# Altium PCB BMS_Rocket.PcbDoc
Units mil, origin at the board's own origin, x right, y up, seen from the top; angles counter-clockwise.
Board outline 2185.14 x 1885 mil, 4 copper layers (Top Layer, GND, Power, Bottom Layer), stack 22.378 mil thick; 56 components, 42 nets, 180 pads, 52 vias.
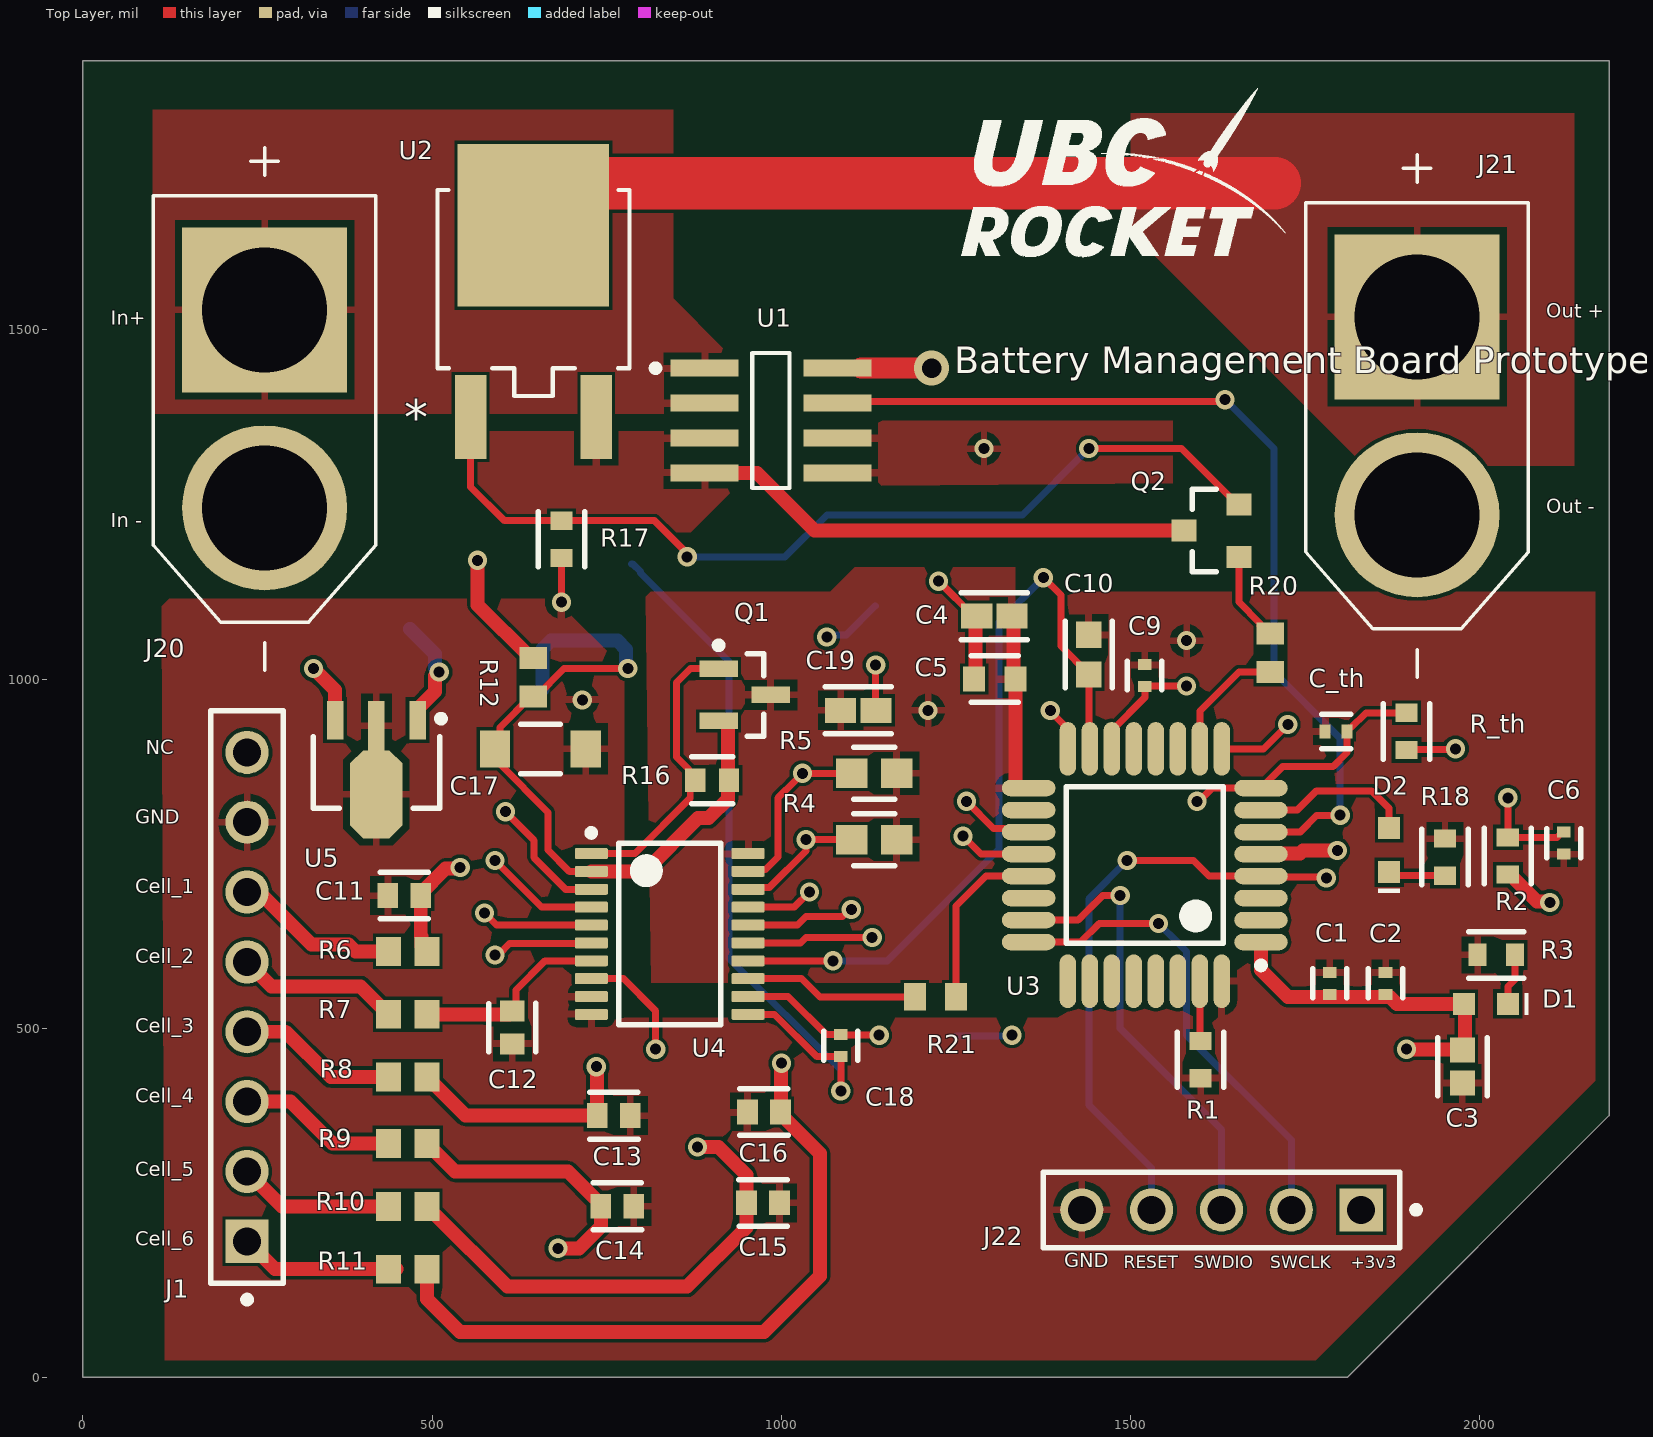
[diagram p0: Top Layer view]
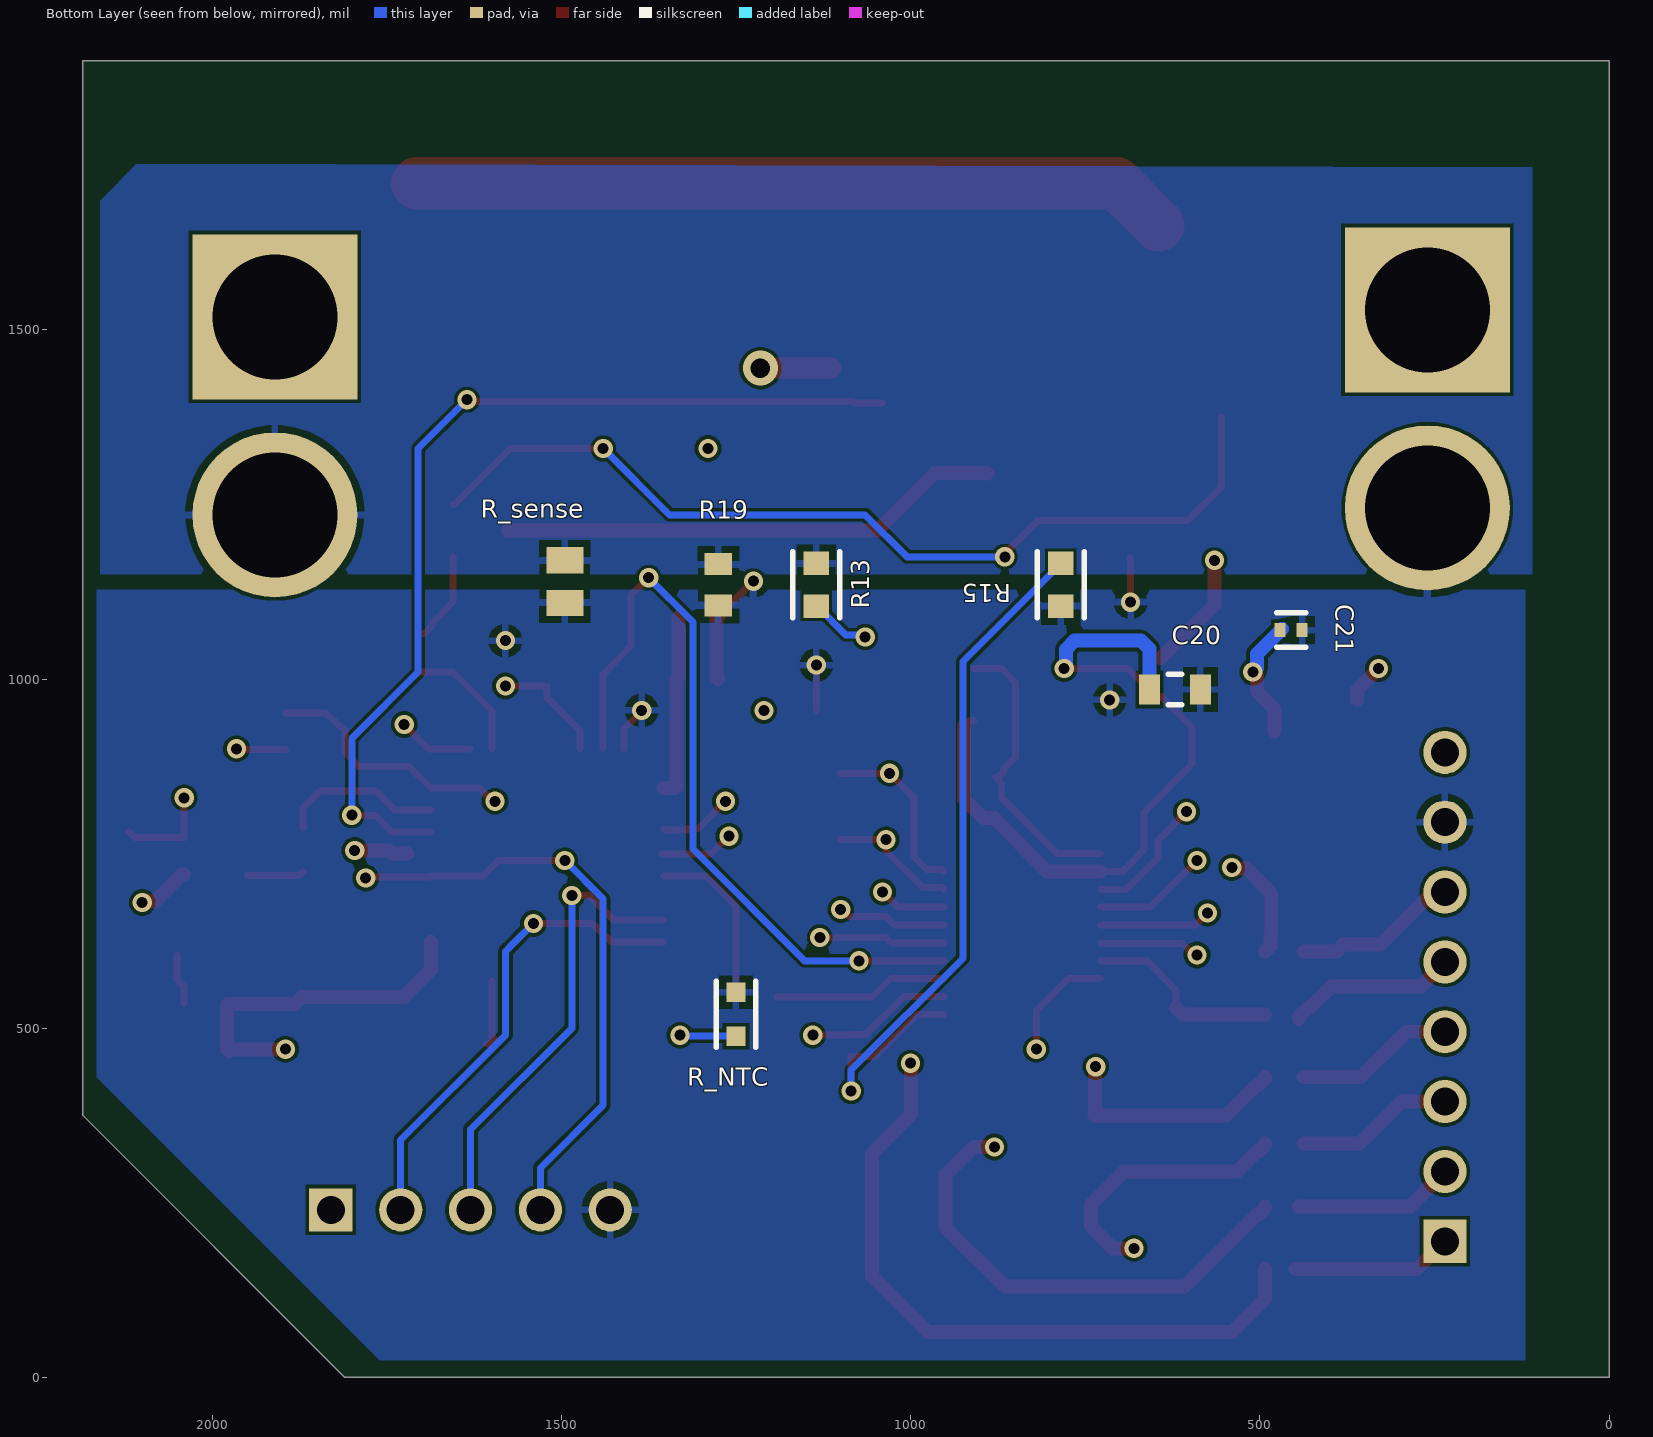
[diagram p1: Bottom Layer view, seen from below]
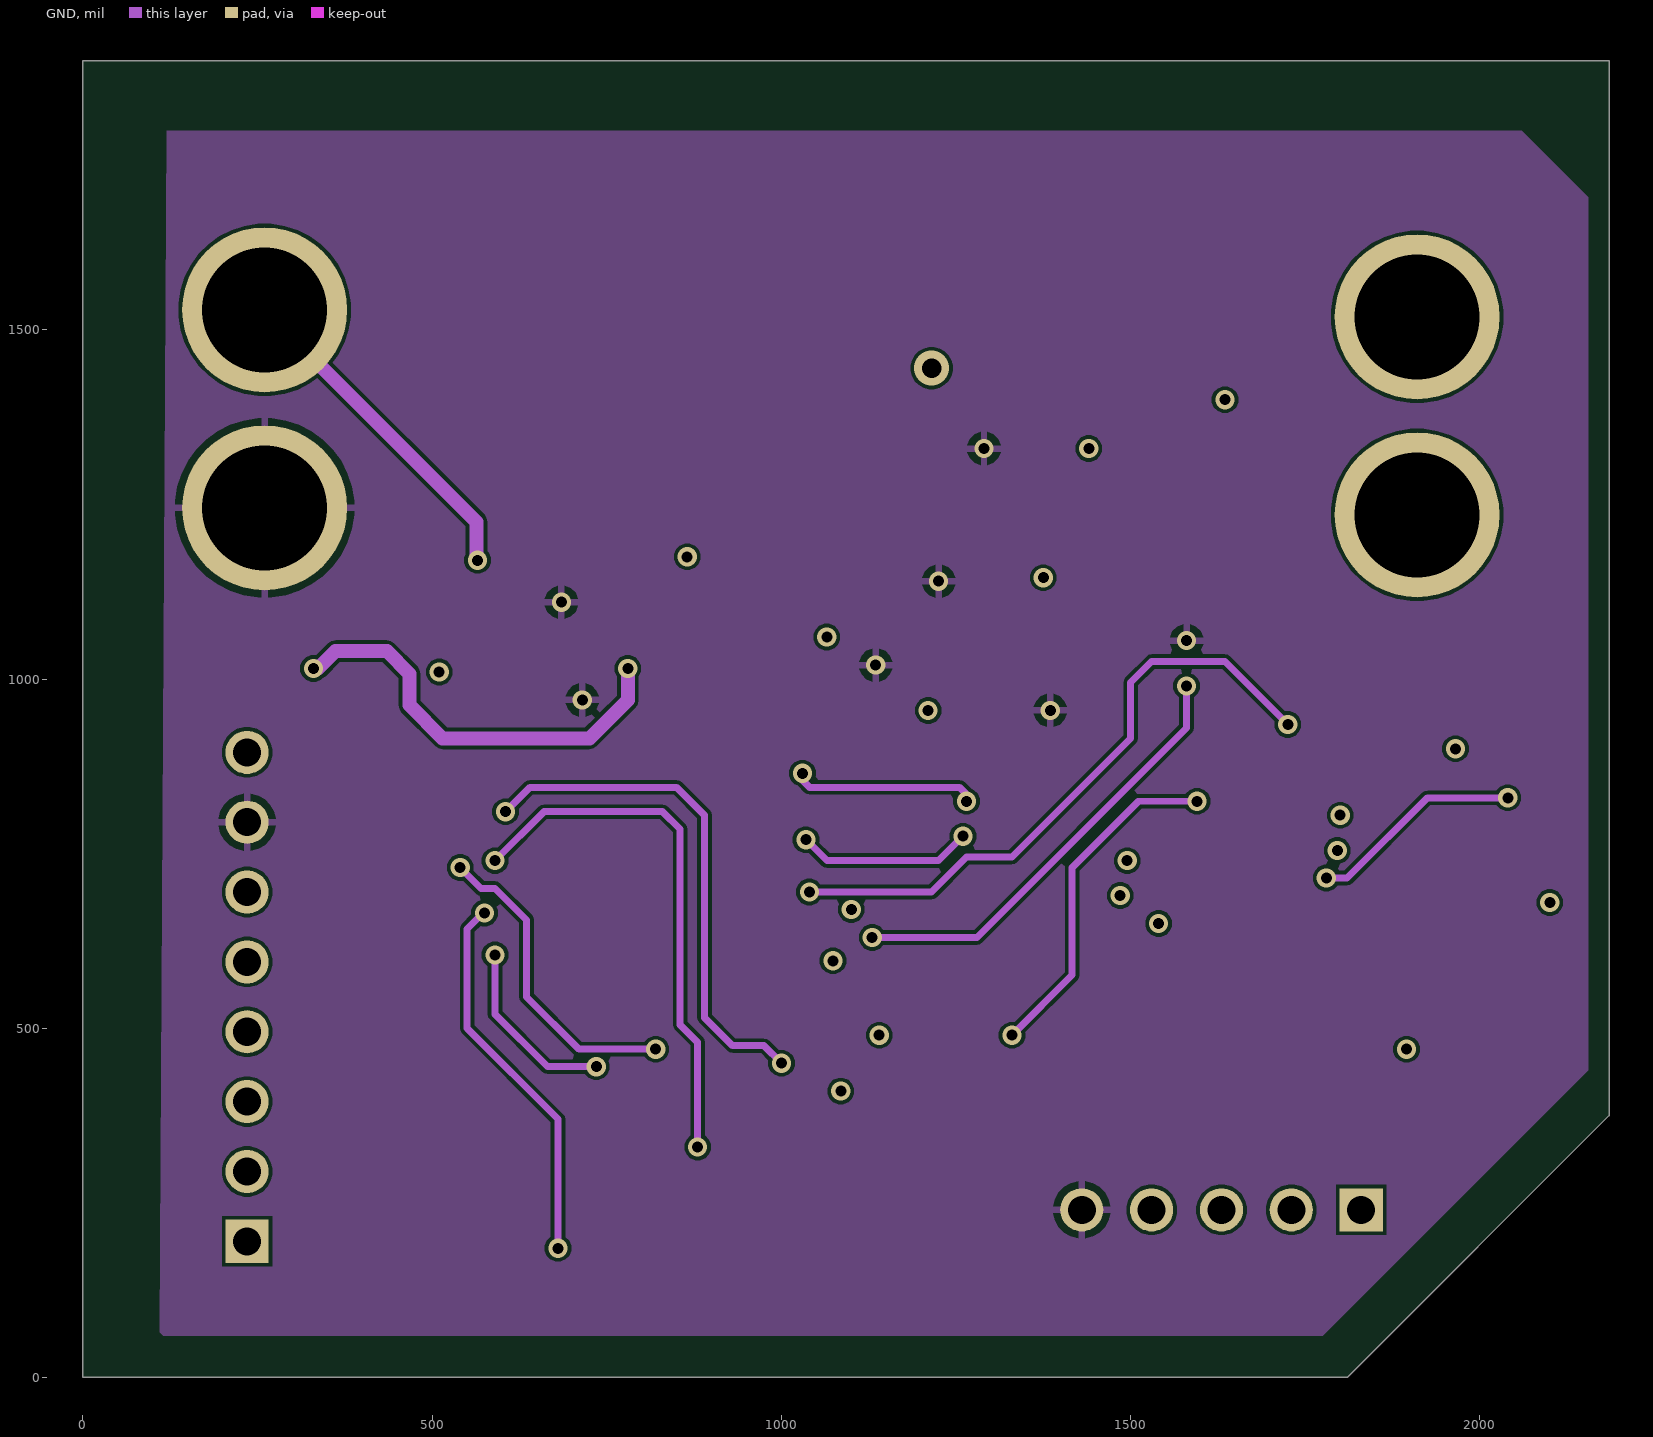
[diagram p2: GND]
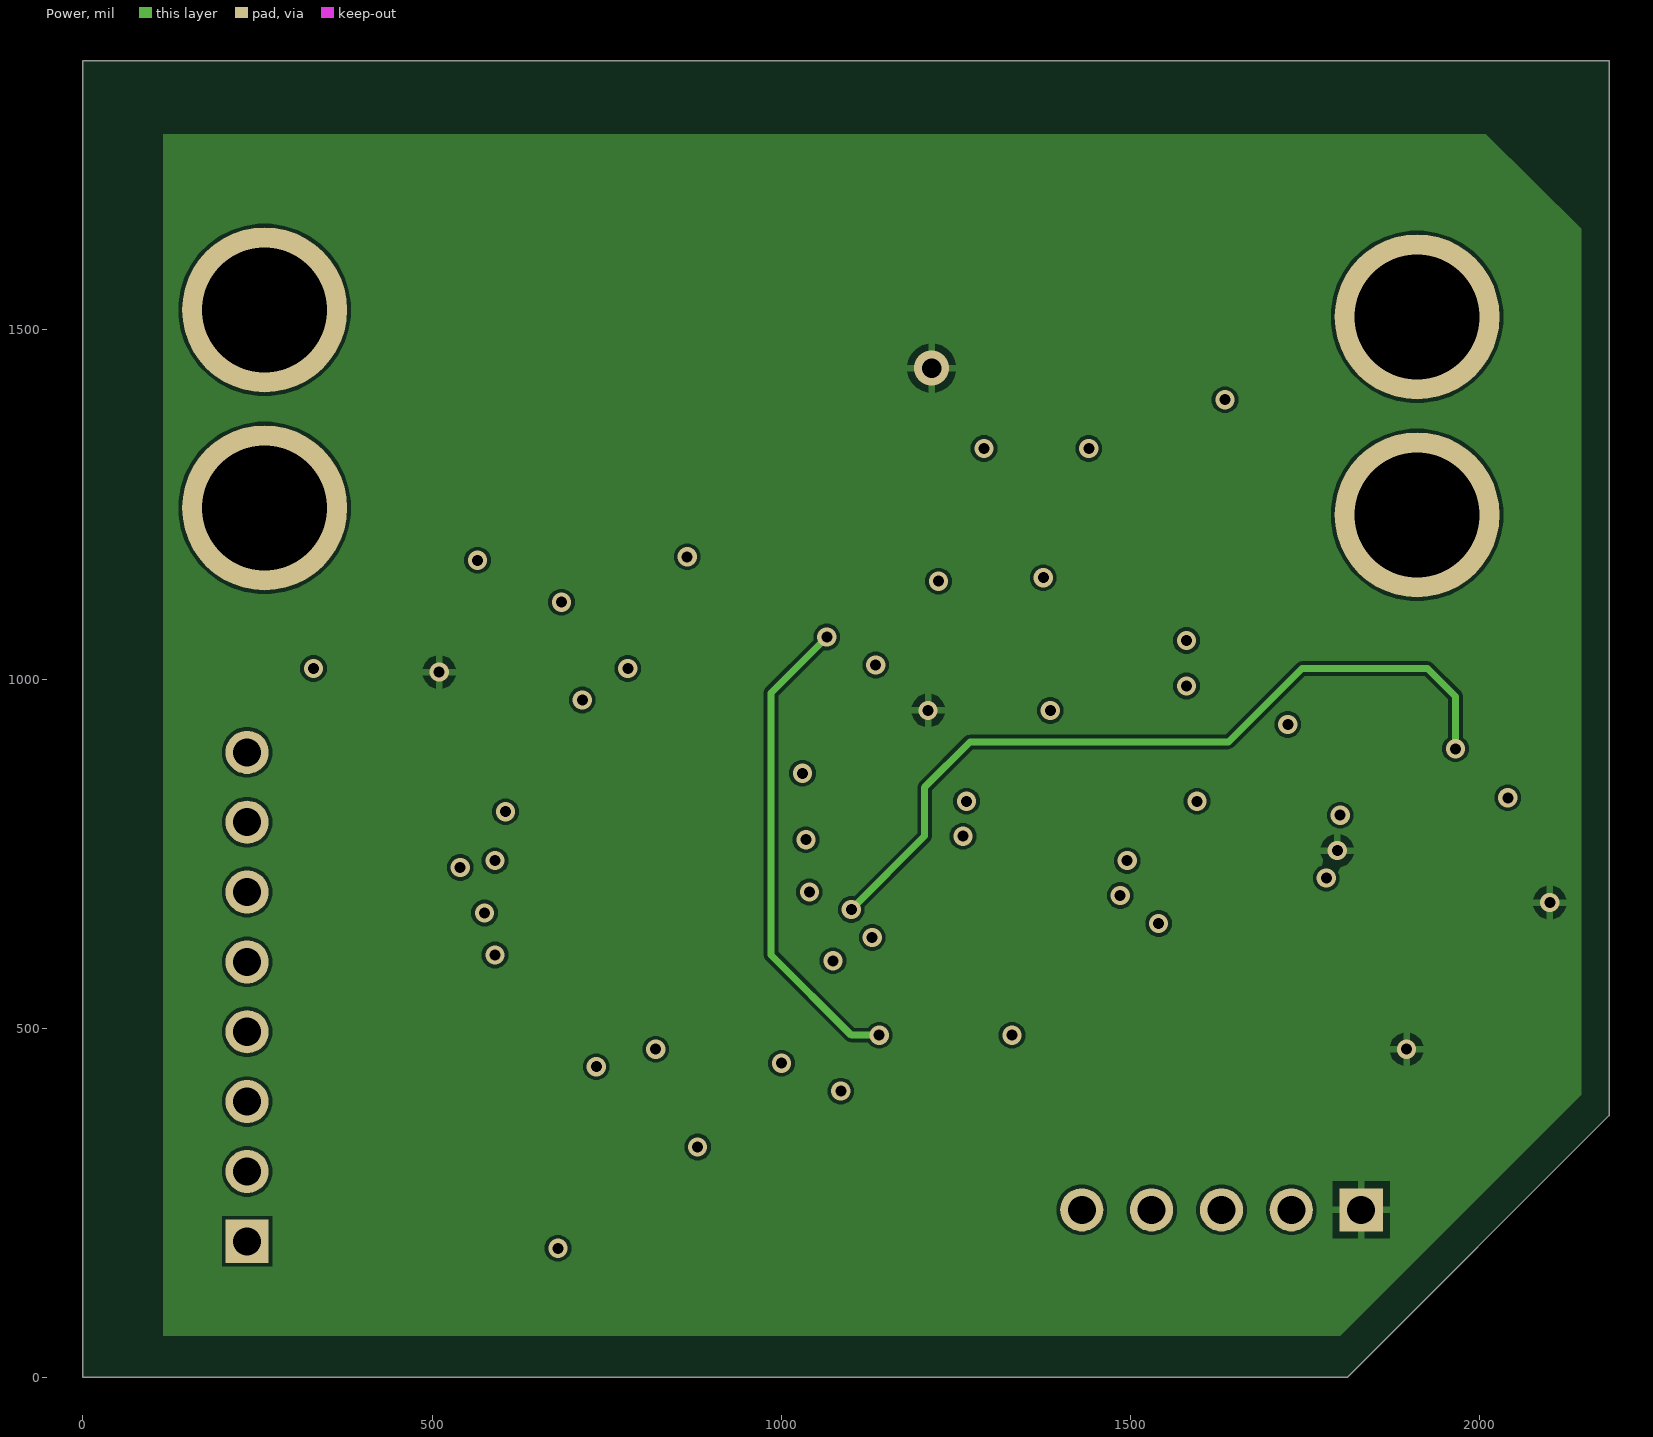
[diagram p3: Power]
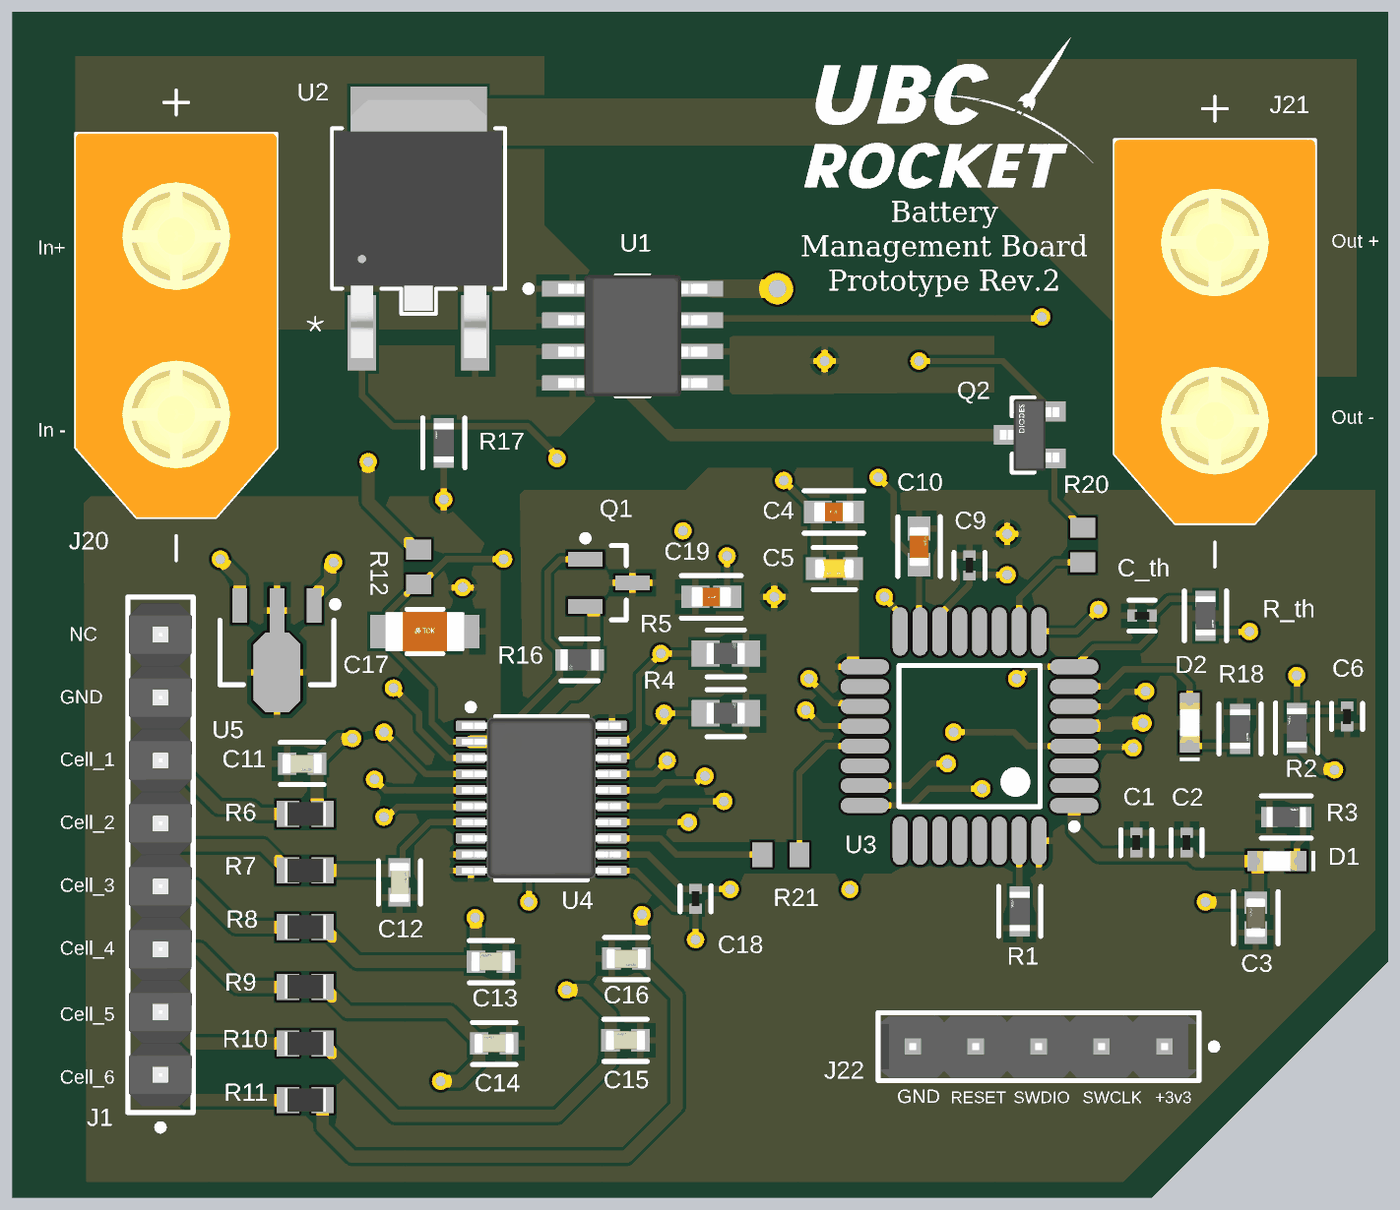
[diagram p4: 3D render of the assembled board from above, using the file's embedded part models]
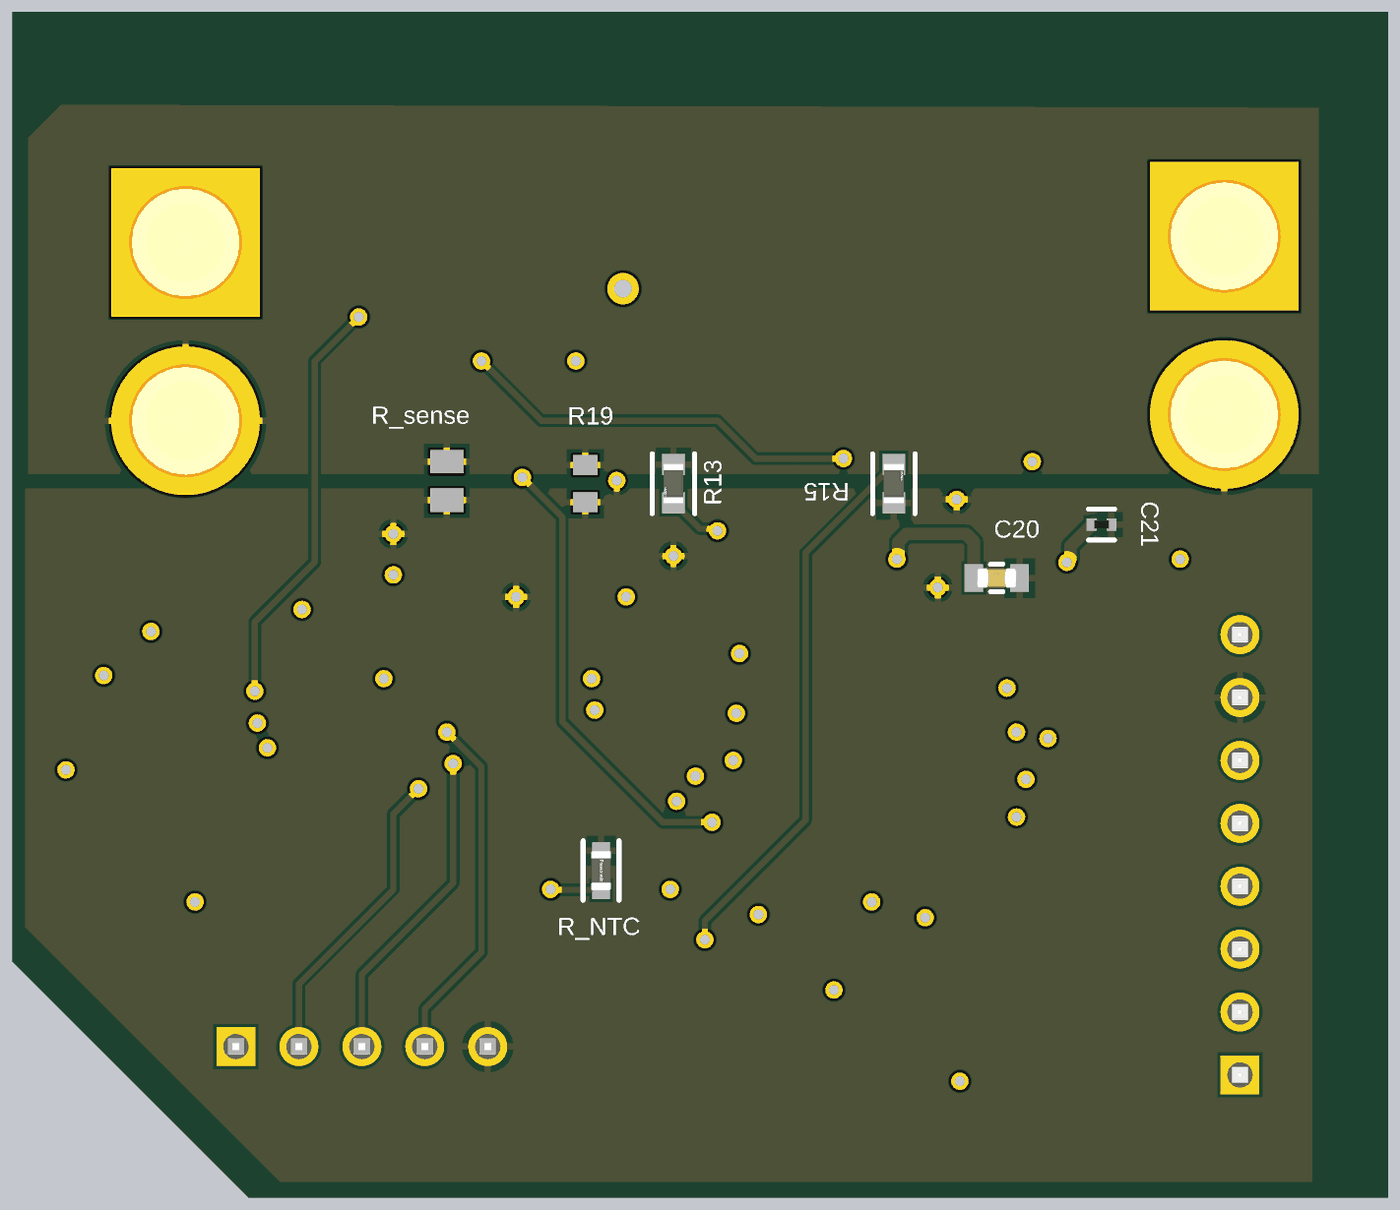
[diagram p5: 3D render of the assembled board from below, using the file's embedded part models]

## Layer stack, top to bottom
Top Solder: solder mask 0.4, Solder Resist, Dk 3.5
Top Layer: signal copper 1.4
Dielectric 2: prepreg 2.8, PP-006, Dk 4.1
GND: signal copper 0.689
Dielectric 1: dielectric 12.6, FR-4, Dk 4.8
Power: signal copper 0.689
Dielectric 3: prepreg 2.8, PP-006, Dk 4.1
Bottom Layer: signal copper 1.4
Bottom Solder: solder mask 0.4, Solder Resist, Dk 3.5

## Board outline
0,1885 -0.14,1884.86 -0.14,0 1810,0 2185,375 2185,1885

## Design rules (kind name [scope] priority, off if disabled: settings)
Clearance [All] p1: gap=5 ignorepadtopadclearanceinfootprint=FALSE except(2: Arc-SMDPad Track-SMDPad SMDPad-SMDPad; 10: Arc-Arc Arc-Track Arc-Text Arc-Hole Track-Track Track-Text Track-Hole SMDPad-Text SMDPad-Hole THPad-Text THPad-Hole Via-Text Via-Hole Fill-Text Fill-Hole Poly-Text Poly-Hole Region-Text Region-Hole Text-Text Text-Hole)
HoleSize HoleSize_1 [All] p1: absolutevalues=TRUE maxlimit=100 minlimit=1 maxpercent=80.000 minpercent=20.000
HoleSize "Stitching Vias" [IsVia] p2: absolutevalues=TRUE maxlimit=100 minlimit=7.87 maxpercent=80.000 minpercent=20.000
PolygonConnect [All] p1: connectstyle=Relief reliefconductorwidth=10 reliefentries=4 polygonreliefangle="90 Angle" airgapwidth=10
RoomDefinition BMS_Rocket [InComponentClass('BMS_Rocket')] p1: confinementstyle=ConfineIn formatcopy=TRUE lockcomponents=FALSE outline -330,-190 2690,-190 2690,2275 -330,2275
RoutingVias [All] p1: holewidth=28 width=50 viastyle="Through Hole" minholewidth=28 minwidth=50 maxholewidth=28 maxwidth=50
SolderMaskExpansion [All] p1: expansion=4 istentingtop=FALSE
SupplyNets "Schematic Supply Nets_5" [InNet('Pack+ Out')] p1: voltage=0.000
SupplyNets "Schematic Supply Nets_4" [InNet('Pack+')] p2: voltage=0.000
SupplyNets "Schematic Supply Nets_3" [InNet('GND')] p3: voltage=0.000
SupplyNets "Schematic Supply Nets_2" [InNet('Pack+ Sensor Out')] p4: voltage=0.000
SupplyNets "Schematic Supply Nets_1" [InNet('Pack-')] p5: voltage=0.000
SupplyNets "Schematic Supply Nets" [InNet('+3V3')] p6: voltage=0.000
Width Width_+3V3 [InNet('+3V3')] p1: maxlimit=40 minlimit=20 preferedwidth=30 minimp=50.000000 maximp=50.000000 favimp=50.000000
Width Width_Pack [(InNet('Pack-') OR InNet('Pack+') OR InNet('Pack+ Out') OR InNet('Pack+ Sensor Out'))] p2: maxlimit=100 minlimit=20 preferedwidth=30 toplayer_prefwidth=50 midlayer1_maxwidth=40 midlayer2_maxwidth=40 bottomlayer_maxwidth=40 minimp=50.000000 maximp=50.000000 favimp=50.000000
Width Width_Cell [(InNet('Cell_1') OR InNet('Cell_2') OR InNet('Cell_3') OR InNet('Cell_4') OR InNet('Cell_5') OR InNet('Cell_6') OR InNet('NetJ1_6') OR InNet('NetJ1_5') OR InNet('NetJ1_4') OR InNet('NetJ1_3') OR InNet('NetJ1_2') OR InNet('NetJ1_1'))] p3: maxlimit=25 minlimit=10 preferedwidth=20 midlayer1_maxwidth=10 midlayer1_prefwidth=10 midlayer2_maxwidth=10 midlayer2_prefwidth=10 minimp=50.000000 maximp=50.000000 favimp=50.000000
29 further rules are at their usual default settings.

## Components (designator, comment, footprint, x,y, rotation, side; value= is the part's Value field where it differs from the comment)
C1 "GRM155R71C104KA88D" FP-GRM15-MFG 1785,564.25 r270 top value=0.10μF
C2 "GRM155R71C104KA88D" FP-GRM15-MFG 1865,564.25 r270 top value=0.10μF
C3 "GRM188R6YA475KE15D" FP-GRM188-0_2-IPC_C 1975,445 r90 top
C4 "C1608X5R1H105K080AB" FP-C1608-080-0_1-IPC_B 1304.78,1090 r0 top
C5 "CC0603KRX7R9BB103" FP-CC0603-DA-MFG 1305.47,1000 r0 top value="10 nF"
C6 "GRM155R71C104KA88D" FP-GRM15-MFG 2120,765 r90 top value=0.10μF
C9 "GRM155R71C104KA88D" FP-GRM15-MFG 1520,1005 r90 top value=0.10μF
C10 "GRM1885C1H202JA01D" FP-GRM188-0_1-e0_2_0_5-IPC_B 1440,1035 r90 top
C11 "C0603C102K5RACTU" FP-C0603C-CF-MFG 460,690 r180 top value="1,000 pF"
C12 "C0603C102K5RACTU" FP-C0603C-CF-MFG 614.76,501.14 r270 top value="1,000 pF"
C13 "C0603C102K5RACTU" FP-C0603C-CF-MFG 760,375 r0 top value="1,000 pF"
C14 "C0603C102K5RACTU" FP-C0603C-CF-MFG 765,245 r0 top value="1,000 pF"
C15 "C0603C102K5RACTU" FP-C0603C-CF-MFG 973.62,250 r0 top value="1,000 pF"
C16 "C0603C102K5RACTU" FP-C0603C-CF-MFG 975,380 r180 top value="1,000 pF"
C17 "C3216X5R1H106M160AB" FP-C3216-160-0_2-MFG 655,900 r0 top
C18 "GRM155R71C104KA88D" FP-GRM15-MFG 1085,475 r90 top value=0.10μF
C19 "C1608X5R1H105K080AB" FP-C1608-080-0_1-IPC_B 1110,955 r180 top
C20 "CGA3E3X7R1H334K080AB" FP-CGA3E-0_3-0_1-IPC_B 621.42,985 r180 bottom
C21 "GRM155R71C104KA88D" FP-GRM15-MFG 455,1070 r0 bottom value=0.10μF
C_th "GRM155R71C104KA88D" FP-GRM15-MFG 1794.25,925 r0 top value=0.10μF
D1 "150060VS75000" WL-SMCW_0603_150060xx75000 2008.5,535 r180 top
D2 "150060SS75000" WL-SMCW_0603_150060xx75000 1870,755 r90 top
J1 "M20-9990846" FP-M20-9990846-MFG 235,545 r90 top
J20 "XT60-M" AMASS_XT60-M 260,1386.73 r270 top
J21 "XT60-M" AMASS_XT60-M 1910,1376.73 r270 top
J22 "22-28-4050" FP-22-28-4050-MFG 1630,240 r180 top
Q1 "BSS84AK,215" NXP-SOT23_N 947.4,977.4 r0 top
Q2 "2N7002-7-F" FP-SOT23-MFG 1615.63,1212.4 r180 top
R1 "RC0603FR-0710KL" FP-RC0603-0_55-IPC_C 1600,455 r90 top
R2 "RC0603FR-0710KL" FP-RC0603-0_55-IPC_C 2040,746.64 r90 top
R3 "RC0603FR-0710KL" FP-RC0603-0_55-IPC_C 2023.36,605 r0 top
R4 "CRCW06034K70FKEA" FP-CRCW0603-e3-IPC_A 1132.9,770 r0 top
R5 "CRCW06034K70FKEA" FP-CRCW0603-e3-IPC_A 1132.9,865 r0 top
R6 "CRCW0603100RFKEA" RESC1609X50X30ML8T20 465,610 r0 top
R7 "CRCW0603100RFKEA" RESC1609X50X30ML8T20 465,520 r0 top
R8 "CRCW0603100RFKEA" RESC1609X50X30ML8T20 465,430 r0 top
R9 "CRCW0603100RFKEA" RESC1609X50X30ML8T20 465,335 r0 top
R10 "CRCW0603100RFKEA" RESC1609X50X30ML8T20 465,245 r0 top
R11 "CRCW0603100RFKEA" RESC1609X50X30ML8T20 465,155 r0 top
R12 "RK73B1JTTD111J" RESC1608X55X30NL20T10 645,1002.56 r270 top
R13 "AC0603FR-071KL" FP-AC0603-IPC_B 1135,1135 r270 bottom
R15 "AC0603FR-071KL" FP-AC0603-IPC_B 785,1135 r90 bottom
R16 "CRCW0603200KFKEA" FP-CRCW0603-e3-IPC_C 900.77,855 r180 top
R17 "RC0603FR-0710KL" FP-RC0603-0_55-IPC_C 685,1200 r90 top
R18 "RC0603FR-0710KL" FP-RC0603-0_55-IPC_C 1950,745 r270 top
R19 "RC0603JR-070RL" RESC1608X55X25ML10T15 1275,1135 r90 bottom
R20 "RK73B1JTTD111J" RESC1608X55X30NL20T10 1700,1037.44 r90 top
R21 "RC0603JR-070RL" RESC1608X55X25ML10T15 1220.47,545 r180 top
R_NTC "ERT-J1VG103FA" FP-ERTJ1-MFG 1250,520 r270 bottom
R_sense "RL1220S-R15-F" RESC2013X50X40LL20T20 1495,1139.49 r90 bottom
R_th "RC0603FR-0710KL" FP-RC0603-0_55-IPC_C 1895,925 r270 top
U1 "TMCS1108A4BQDR" D0008A-IPC_A 985,1370 r0 top
U2 "FQD11P06TM" TO-252-3_ONS 644.96,1572.5 r0 top
U3 "STM32F030K6T6TR" STM-LQFP32_M 1520.24,733.66 r180 top
U4 "BQ76925PWR" PW0020A_L 840,635 r0 top
U5 "L78L33ABUTR" SOT-89_N 420,866.5 r270 top

## Footprints (in the part's own frame and the unit in brackets; to place one, negate y for a bottom-side part, rotate by r counter-clockwise, add the part's x,y. Pads: shape width x height; smd on the part's side, far side on the other; paste and mask are expansions set on the pad)
AMASS_XT60-M [mm]
  round 6 hole 4.55: N(3.6,0)
  rect 6x6 / inner round 6 / far side rect 6x6 hole 4.55: P(-3.6,0)
  silkscreen extent -9.5,-4.05 9.5,4.05, body extent -7.75,-4.05 7.75,4.05, height 16
D0008A-IPC_A [mil]
  rect 97.21x24.49 smd paste+0 mask+0: 1(-95.02,75) 2(-95.02,25) 3(-95.02,-25) 4(-95.02,-75) 5(95.02,-75) 6(95.02,-25) 7(95.02,25) 8(95.02,75)
  silkscreen extent -170,-97 27,97, body extent -119,-96 119,96, height 64
FP-22-28-4050-MFG [mm]
  rect 1.57x1.57 hole 1.02 paste-2539.97 mask+0: 1(-5.08,0)
  round 1.57 hole 1.02 paste-2539.97 mask+0: 2(-2.54,0) 3(0,0) 4(2.54,0) 5(5.08,0)
  silkscreen extent -7.2,-1.37 6.48,1.37, body extent -6.58,-1.47 6.58,1.47, height 0.25
FP-AC0603-IPC_B [mil]
  rect 33.81x35.91 smd paste+0 mask+0: 1(-30.58,0) 2(30.58,0)
  silkscreen extent -47,-34 47,34, body extent -31,-16 31,16, height 22
FP-C0603C-CF-MFG [mm]
  rect 0.75x0.9 smd paste+0 mask+0: 1(-0.6,0) 2(0.6,0)
  silkscreen extent -0.87,-0.85 0.88,0.85, body extent -1.2,-0.6 1.2,0.6, height 0.25
FP-C1608-080-0_1-IPC_B [mil]
  rect 44.53x35.91 smd paste+0 mask+0: 1(-25.22,0) 2(25.22,0)
  silkscreen extent -47,-34 47,34, body extent -57,-28 57,28, height 10
FP-C3216-160-0_2-MFG [mm]
  rect 1.1x1.35 smd paste+0 mask+0: 1(-1.65,0) 2(1.65,0)
  silkscreen extent -0.72,-0.9 0.72,0.9, body extent -1.6,-0.8 1.6,0.8, height 1.8
FP-CC0603-DA-MFG [mm]
  rect 0.8x0.9 smd paste+0 mask+0: 1(-0.75,0) 2(0.75,0)
  silkscreen extent -0.85,-0.85 0.85,0.85, body extent -1.35,-0.75 1.35,0.75, height 0.25
FP-CGA3E-0_3-0_1-IPC_B [mm]
  rect 0.756x1.106 smd paste+0 mask+0: 1(-0.925,0) 2(0.925,0)
  silkscreen extent -0.25,-0.55 0.25,0.55, body extent -0.8,-0.4 0.8,0.4, height 1.1
FP-CRCW0603-e3-IPC_A [mil]
  rect 44.69x41.82 smd paste+0 mask+0: 1(-32.1,0) 2(32.1,0)
  silkscreen extent -30,-37 30,37, body extent -31,-17 31,17, height 20
FP-CRCW0603-e3-IPC_C [mil]
  rect 28.94x33.94 smd paste+0 mask+0: 1(-24.23,0) 2(24.23,0)
  silkscreen extent -30,-33 30,33, body extent -43,-23 43,23, height 10
FP-ERTJ1-MFG [mm]
  rect 0.7x0.7 smd paste+0 mask+0: 1(-0.8,0) 2(0.8,0)
  silkscreen extent -1.2,-0.72 1.2,0.72, body extent -0.8,-0.4 0.8,0.4, height 0.9
FP-GRM15-MFG [mm]
  rect 0.4x0.5 smd paste+0 mask+0: 1(-0.4,0) 2(0.4,0)
  silkscreen extent -0.53,-0.63 0.53,0.63, body extent -0.7,-0.38 0.7,0.38, height 0.25
FP-GRM188-0_1-e0_2_0_5-IPC_B [mil]
  rect 37.74x35.91 smd paste+0 mask+0: 1(-28.61,0) 2(28.61,0)
  silkscreen extent -47,-34 47,34, body extent -57,-28 57,28, height 10
FP-GRM188-0_2-IPC_C [mil]
  rect 35.63x35.68 smd paste+0 mask+0: 1(-23.64,0) 2(23.64,0)
  silkscreen extent -41,-35 41,35, body extent -45,-24 45,24, height 10
FP-M20-9990846-MFG [mm]
  rect 1.57x1.57 hole 1.02 paste-2539.97 mask+0: 1(-8.89,0)
  round 1.57 hole 1.02 paste-2539.97 mask+0: 2(-6.35,0) 3(-3.81,0) 4(-1.27,0) 5(1.27,0) 6(3.81,0) 7(6.35,0) 8(8.89,0)
  silkscreen extent -11.13,-1.32 10.41,1.32, body extent -10.51,-1.42 10.51,1.42, height 0.25
FP-RC0603-0_55-IPC_C [mil]
  rect 25.93x31.97 smd paste+0 mask+0: 1(-26.64,0) 2(26.64,0)
  silkscreen extent -40,-33 40,33, body extent -44,-22 44,22, height 10
FP-SOT23-MFG [mm]
  rect 0.9x0.8 smd paste+0 mask+0: 1(-1,0.95) 2(-1,-0.95) 3(1,0)
  silkscreen extent -0.18,-1.5 0.7,1.5, body extent -1.55,-1.6 1.55,1.6, height 0.25
NXP-SOT23_N [mm] "SOT23, 3-Leads, Body 3x1.4mm, Pitch 0.95mm, IPC Medium Density"
  rect 1.4x0.6 smd: 1(-0.95,0.95) 2(-0.95,-0.95) 3(0.95,0)
  silkscreen extent -1.07,-1.5 0.7,1.92, body extent -0.7,-1.5 0.7,1.5, height 1.1
PW0020A_L [mm] "SOP, 20-Leads, Body 6.6x4.5mm, Pitch 0.65mm, IPC High Density"
  rrect25% 1.2x0.4 smd: 1(-2.85,2.925) 2(-2.85,2.275) 3(-2.85,1.625) 4(-2.85,0.975) 5(-2.85,0.325) 6(-2.85,-0.325) 7(-2.85,-0.975) 8(-2.85,-1.625) 9(-2.85,-2.275) 10(-2.85,-2.925) 11(2.85,-2.925) 12(2.85,-2.275) 13(2.85,-1.625) 14(2.85,-0.975) 15(2.85,-0.325) 16(2.85,0.325) 17(2.85,0.975) 18(2.85,1.625) 19(2.85,2.275) 20(2.85,2.925)
  silkscreen extent -2.97,-3.3 1.85,3.8, body extent -3.21,-3.25 3.21,3.25, height 1
RESC1608X55X25ML10T15 [mm] "Chip Resistor, 2-Leads, Body 1.60x0.80mm, IPC Low Density"
  rect 0.8x1 smd: 1(-0.75,0) 2(0.75,0)
  body extent -0.85,-0.45 0.85,0.45, height 0.55
RESC1608X55X30NL20T10 [mm] "Chip Resistor, 2-Leads, Body 1.60x0.80mm, IPC Medium Density"
  rect 0.8x1 smd: 1(-0.7,0) 2(0.7,0)
  body extent -0.9,-0.5 0.9,0.5, height 0.55
RESC1609X50X30ML8T20 [mm] "Chip Resistor, 2-Leads, Body 1.65x0.95mm, IPC Low Density"
  rect 0.9x1.05 smd: 1(-0.7,0) 2(0.7,0)
  body extent -0.82,-0.48 0.82,0.48, height 0.5
RESC2013X50X40LL20T20 [mm] "Chip Resistor, 2-Leads, Body 2.00x1.25mm, IPC High Density"
  rect 0.95x1.35 smd: 1(-0.775,0) 2(0.775,0)
  body extent -1.1,-0.72 1.1,0.72, height 0.5
SOT-89_N [mm] "SOT89, 3-Leads, Body 4.5x2.4 mm, Pitch 1.5mm, Lead Span 4.1mm, IPC Medium Density"
  rect 1.4x0.6 smd: 1(-1.9,1.5) 3(-1.9,-1.5)
  rect 1.8x0.6 smd: 2(-1.7,0)
  oct 3.2x1.9 smd: 2(0.8,0)
  silkscreen extent -2.07,-2.3 1.3,2.48, body extent -1.3,-2.3 1.3,2.3, height 1.6
STM-LQFP32_M [mm] "QFP, 32-Leads, Body 7x7mm, Pitch 0.8mm, IPC Low Density"
  oval 1.95x0.6 smd: 1(-4.225,2.8) 2(-4.225,2) 3(-4.225,1.2) 4(-4.225,0.4) 5(-4.225,-0.4) 6(-4.225,-1.2) 7(-4.225,-2) 8(-4.225,-2.8) 17(4.225,-2.8) 18(4.225,-2) 19(4.225,-1.2) 20(4.225,-0.4) 21(4.225,0.4) 22(4.225,1.2) 23(4.225,2) 24(4.225,2.8)
  oval 0.6x1.95 smd: 9(-2.8,-4.225) 10(-2,-4.225) 11(-1.2,-4.225) 12(-0.4,-4.225) 13(0.4,-4.225) 14(1.2,-4.225) 15(2,-4.225) 16(2.8,-4.225) 25(2.8,4.225) 26(2,4.225) 27(1.2,4.225) 28(0.4,4.225) 29(-0.4,4.225) 30(-1.2,4.225) 31(-2,4.225) 32(-2.8,4.225)
  silkscreen extent -4.35,-2.85 2.85,3.77, body extent -3.5,-3.5 3.5,3.5, height 1.6
TO-252-3_ONS [mil]
  rect 45x120 smd paste+0 mask+0: 1(-89.96,-197.5) 3(89.96,-197.5)
  rect 217x233 smd paste+0 mask+0: 4(0,77)
  silkscreen extent -138,-168 138,128, body extent -133,-238 133,173, height 99
WL-SMCW_0603_150060xx75000 [mm] "SMD Mono-color Chip LED, body 1.60 x 0.80 mm"
  rect 0.8x0.8 smd: 1(-0.8,0) 2(0.8,0)
  silkscreen extent -1.55,-0.4 -1.4,0.4, body extent -0.8,-0.4 0.8,0.4, height 0.7

## Part data
C1 C2 C6 C9 C18 C21 C_th: library part CMP-2100-03641-2, "CAP CER 0.1UF 16V X7R 0402", Capacitance=0.10μF, Manufacturer=Murata, Package=GRM15, Temperature="-55°C to +125°C", Temperature Characteristic=X7R, Temperature Range High=+125°C, Temperature Range Low=-55°C, Tolerance=10%, Voltage Rating=16Vdc, Category=Cap, ComponentLink2Description=Datasheet, ComponentLink2URL=https://search.murata.co.jp/Ceramy/image/img/A01X/G101/ENG/GRM155R71H471KA01-01A.pdf, Device Class L1="Passive Components", Device Class L2=Capacitors, Device Class L3="Ceramic Capacitors", Digikey Description="CAP CER 0.1UF 16V X7R 0402", Height=0.55mm, Ipc Land Pattern Name=CAPC10050X219, Lead Free=yes, Manufacturer Part Number=GRM155R71C104KA88D, Material=Ceramic, Mouser Description="0402 0.1 uF 16V ±10 % Tolerance X7R SMT Multilayer Ceramic Capacitor", Octopart=https://octopart.com/grm155r71c104ka88d-murata-196880, RoHS=TRUE, Standoff Height=0mm
C3: library part CMP-2006-02545-2, "Chip Multilayer Ceramic Capacitors for General Purpose, 0603, 4.7uF, X5R, 15%, 10%, 35V", Capacitance=4.7uF, Case Code (Imperial)=0603, Case Code (Metric)=1608, Dielectric=X5R, Max Operating Temperature=85°C, Min Operating Temperature=-55°C, Package Quantity=4000, Resistor Type=Ceramic, Tolerance=10%, Voltage=35V, Case/Package=0603, Depth=0.8mm, Height=0.8mm, Lead Free="Lead Free", Length=1.6mm, Material=Ceramic, Mount="Surface Mount", Packaging="Tape and Reel", REACH SVHC="No SVHC", Termination=SMD/SMT, Thickness=0.031inch, Voltage Rating=35V, Voltage Rating (DC)=35V, Weight=0.000222oz, Width=0.8mm
C4 C19: library part CMP-2000-06025-2, "Multilayer Ceramic Capacitors 1μF ±10% 50V X5R SMD 0603", Capacitance=1uF, Case Code (Imperial)=0603, Case Code (Metric)=1608, Dielectric=X5R, Dielectric Material=Ceramic, Max Operating Temperature=85°C, Min Operating Temperature=-55°C, Package Quantity=1, Tolerance=10%, Voltage=50V, Case/Package=0603, Construction=Flat, Depth=0.8mm, Height=0.8mm, Lead Free="Lead Free", Length=1.6mm, Mount="Surface Mount", Number of Pins=2, Packaging="Tape and Reel", Radiation Hardening=No, REACH SVHC="No SVHC", Resistor Type=Ceramic, RoHS Compliant=Yes, Series=C, Termination=SMD/SMT, Thickness=0.035inch, Voltage Rating=50V, Voltage Rating (DC)=50V, Weight=7.1E-05oz, Width=0.031inch
C5: library part CMP-2100-03600-2, "CAP CER 10000PF 50V X7R 0603", Capacitance="10 nF", Manufacturer=YAGEO, Package=CC0603-DA, Temperature="-55°C to +125°C", Temperature Characteristic=X7R, Temperature Coefficient=15%, Temperature Range High=+125°C, Temperature Range Low=-55°C, Tolerance=0.1, Voltage="50 V", Automotive=No, Category=Cap, ComponentLink2Description=Datasheet, ComponentLink2URL=http://www.yageo.com/documents/recent/UPY-GPHC_X7R_6.3V-to-50V_18.pdf, Device Class L1="Passive Components", Device Class L2=Capacitors, Device Class L3="Ceramic Capacitors", Digikey Description="CAP CER 10000PF 50V X7R 0603", Footprint Url=http://www.yageo.com/exep/pages/download/literatures/UPY-C_GEN_24.pdf, Height=0.9mm, Lead Free=Yes, Manufacturer Part Number=CC0603KRX7R9BB103, Material=Ceramic, Mouser Description="Multilayer Ceramic Capacitor, CC Series, 0.01 - F, - 10%, X7R, 50 V, 0603 [1608 Metric]", Octopart=https://octopart.com/cc0603krx7r9bb103-yageo-192938, RoHS=TRUE, Voltage Rating="50 V"
C10: library part CMP-2006-02494-2, "Chip Multilayer Ceramic Capacitors for General Purpose, 0603, 2000pF, C0G, 30ppm/°C, 5%, 50V", Capacitance=2nF, Case Code (Imperial)=0603, Case Code (Metric)=1608, Dielectric=C0G, Max Operating Temperature=125°C, Min Operating Temperature=-55°C, Package Quantity=1, Tolerance=5%, Voltage=50V, Case/Package=0603, Depth=0.8mm, Height=0.8mm, Lead Free="Lead Free", Length=1.6mm, Material=Ceramic, Mount="Surface Mount", Packaging="Tape and Reel", Radiation Hardening=No, REACH SVHC="No SVHC", Termination=SMD/SMT, Thickness=0.035inch, Voltage Rating=50V, Voltage Rating (DC)=50V, Width=0.8mm
C11 C12 C13 C14 C15 C16: library part CMP-2006-03022-3, "CAP CER 1000PF 50V X7R 0603", Capacitance="1,000 pF", Manufacturer=KEMET, Package=C0603C-CF, Temperature="-55°C to +125°C", Temperature Characteristic=X7R, Temperature Coefficient=30ppm/°C, Temperature Range High=+125°C, Temperature Range Low=-55°C, Tolerance=0.1, Voltage Rating="50 V", Automotive=Yes, Automotive Grade="Grade 1", Category=Cap, ComponentLink2Description=Datasheet, ComponentLink2URL=https://api.kemet.com/component-edge/download/datasheet/C0603C100J5GACAUTO.pdf, Device Class L1="Passive Components", Device Class L2=Capacitors, Device Class L3="Ceramic Capacitors", Digikey Description="CAP CER 1000PF 50V X7R 0603", Height=0.87mm, Lead Free=Yes, Manufacturer Part Number=C0603C102K5RACTU, Material=Ceramic, Mouser Description="Capacitor; Ceramic; Cap; 1000pF; Tol 10%; SMT; Vol-Rtg 50V; X7R; Tape and Reel", Octopart=https://octopart.com/c0603c102k5ractu-kemet-144878, RoHS=TRUE
C17: library part CMP-08246-006999-1, "Multilayer Ceramic Capacitors 10uF ±20% 50V X5R SMD 1206", Capacitance=10uF, Case Code (Imperial)=1206, Case Code (Metric)=3216, Dielectric=X5R, Dielectric Material=Ceramic, Max Operating Temperature=85°C, Min Operating Temperature=-55°C, Package Quantity=1, Tolerance=20%, Voltage Rating=50V, Case/Package=1206, Construction=Flat, Depth=1.6mm, Height=1.6mm, Lead Free="Lead Free", Length=3.2mm, Mount="Surface Mount", Packaging="Tape and Reel", Radiation Hardening=No, REACH SVHC="No SVHC", Resistor Type=Ceramic, RoHS Compliant=Yes, Series=C, Termination=SMD/SMT, Thickness=0.071inch, Voltage Rating (DC)=50V, Weight=0.000571oz, Width=0.063inch
C20: library part CMP-08246-003263-1, "Cap Ceramic 330nF 50V X7R 10% Pad SMD 0603 +125°C Automotive T/R", Capacitance=330nF, Case Code (Imperial)=0603, Case Code (Metric)=1608, Dielectric=X7R, Max Operating Temperature=125°C, Min Operating Temperature=-55°C, Package Quantity=4000, Ratings=AEC-Q200, Tolerance=10%, Voltage Rating=50V, Case/Package=0603, Height=0.8mm, Length=0.063inch, Mount="Surface Mount", Packaging="Tape and Reel", RoHS Compliant=Yes, Termination=SMD/SMT, Thickness=0.035inch, Voltage Rating (DC)=50V, Weight=7.1E-05oz, Width=0.031inch
D1: library part CMP-1426-00006-7, "WURTH ELEKTRONIK - 150060VS75000 - LED, Green, SMD, 0603, 30 mA, 2 V, 570 nm", Case Code (Imperial)=0603, Case Code (Metric)=1608, Color=Green, Forward Current=100mA, Forward Voltage=2V, Max Junction Temperature (Tj)=95°C, Max Operating Temperature=85°C, Max Reverse Voltage (DC)=5V, Min Operating Temperature=-40°C, Power Dissipation=72mW, Test Current=20mA, Case/Package=0603, Dominant Wavelength=570nm, Height=700µm, Length=1.6mm, Lens Style="Clear, Rectangular", Luminous Intensity=40mcd, Mount="Surface Mount", Number of Pins=2, Packaging="Tape and Reel", Peak Wavelength=572nm, REACH SVHC=Unknown, Reverse Voltage=5V, RoHS=Compliant, Viewing Angle=140°, Wavelength=570nm, Width=800µm
D2: library part CMP-1426-00004-3, "Led, Red, 630 Nm, 1.9 V, 30 Ma, 60 Mcd Rohs Compliant: Yes", Case Code (Imperial)=0603, Case Code (Metric)=1608, Color=Red, Forward Current=100mA, Forward Voltage=1.9V, Max Operating Temperature=85°C, Max Reverse Voltage (DC)=5V, Min Operating Temperature=-40°C, Test Current=20mA, Case/Package=0603, Dominant Wavelength=630nm, Height=700µm, Length=1.6mm, Lens Style="Clear, Rectangular", Luminous Intensity=60mcd, Mount="Surface Mount", Packaging="Tape and Reel", Peak Wavelength=645nm, REACH SVHC=Unknown, RoHS=Compliant, Viewing Angle=140°, Wavelength=630nm, Width=800µm
J1: library part CMP-15831-000033-1, "CONN HEADER VERT 8POS 2.54MM", Case/Package=SIL, Color=Black, Contact Resistance=30mR, Current Rating=3A, Insulation Resistance=1GR, Max Operating Temperature=105°C, Min Operating Temperature=-40°C, Package Quantity=1000, Connector Type="Male Pin", Contact Material=Brass, Contact Mating Length=0.24inch, Contact Plating=Tin, Contact Type="Male Pin", Depth=2.54mm, Gender=Male, Housing Color=Black, Housing Material=Nylon, Length=20.32mm, Max Current Rating=3A, Mount="Through Hole", Number Of Contacts=8, Number of Positions=8, Number Of Rows=1, Orientation=Straight, Packaging=Bulk, Pitch=2.54mm, Radiation Hardening=No, REACH SVHC="No SVHC", RoHS Compliant=Yes, Series=M20, Termination=Solder
J20 J21: library part CMP-005-000000-1, "Plug; DC supply; XT60; male; PIN: 2; for cable; soldered; 30A; 500V", Package=Package, Check_prices=https://www.snapeda.com/parts/XT60-M/AMASS/view-part/?ref=eda, Component Type=Standard, Design Item ID=XT60-M, MF=AMASS, MP=XT60-M, Pin Count=2, SnapEDA_Link=https://www.snapeda.com/parts/XT60-M/AMASS/view-part/?ref=snap, Source=XT60-M.SchLib
J22: library part CMP-00257-00278173-1, "22-28-4050 KK® 254 Breakaway Header, Vertical, 5 Circuits, Tin (Sn) Plating, Mating Pin Length 6.09mm", Color=Black, Contact Resistance=20mΩ, Current Rating=4A, Flammability Rating="UL94 V-0", Max Operating Temperature=75°C, Max Voltage Rating (DC)=250.25kV, Min Operating Temperature=0°C, Voltage Rating=250V, Connector Type="Male Pin", Contact Material=Brass, Contact Mating Length=6.096mm, Contact Plating=Tin, Gender=Male, Glow Wire Compliant=Non-compliant, Height=2.29mm, Housing Color=Black, Housing Material=Thermoplastic, Lead Free="Lead Free", Lead Pitch=2.54mm, Length=12.7mm, Mount="Through Hole", NexarPartId=278173, Number of Circuits=5, Number Of Contacts=5, Number of Positions=5, Number Of Rows=1, Orientation=Vertical, Packaging=Bulk, Pitch=2.54mm, Radiation Hardening=No, REACH SVHC=Unknown, RoHS=Compliant, Schedule B=8536694040, Termination=Solder, Voltage Rating (DC)=250V, Width=2.49mm
Q1: library part CMP-1259-00086-1, "P-Channel Trench MOSFET, -50 V, -0.18 A, -55 to 150 degC, 3-Pin SOT23, Tape and Reel", Manufacturer="NXP Semiconductors", Automotive Qualified=Y, Channel Type=P, Code_JEDEC=TO-236AB, ComponentLink1Description="Manufacturer URL", ComponentLink1URL=http://www.nxp.com/, ComponentLink2Description=Datasheet, ComponentLink2URL=http://www.nxp.com/documents/data_sheet/BSS84AK.pdf, ComponentLink3Description="Package Specification", ComponentLink3URL=http://www.nxp.com/documents/outline_drawing/sot023_po.pdf, DatasheetVersion="Rev. 1", ID [max] (A)=-0.18, IDM [max] (A)=-0.7, Mounting Technology="Surface Mount", PackageDescription="3-Pin Small Outline Transistor Package, Body 2.9 x 1.3 mm, Pitch 0.95 mm", PackageReference=SOT23, PackageVersion="06-03-16, 03/2006", Packing="Tape & Reel", PartNumber=BSS84AK,215, VDS [max] (V)=-50, VGSth [typ] (V)=-1.6
Q2: library part CMP-2000-04929-2, "MOSFET N-CH 60V 115MA SOT23-3", Case/Package=SOT-23, Continuous Drain Current (ID)=115mA, Drain To Source Breakdown Voltage=70V, Drain To Source Resistance=7.5R, Drain to Source Voltage (Vdss)=60V, Gate to Source Voltage (Vgs)=20V, Input Capacitance=50pF, Max Operating Temperature=150°C, Max Power Dissipation=300mW, Min Operating Temperature=-55°C, Package Quantity=3000, Power Dissipation=540mW, Threshold Voltage=2.5V, Contact Plating=Tin, Current Rating=115mA, Dual Supply Voltage=60V, Element Configuration=Single, Fall Time=5.6ns, Height=1mm, Lead Free="Lead Free", Length=2.9mm, Mount="Surface Mount", Nominal Vgs=2.5V, Number Of Channels=1, Number of Elements=1, Number of Pins=3, On-State Resistance=7.5R, Packaging="Tape and Reel", Radiation Hardening=No, Rds On Max=7.5R, REACH SVHC="No SVHC", Rise Time=3ns, Termination=SMD/SMT, Turn-Off Delay Time=11ns, Turn-On Delay Time=7ns, Voltage=60V, Voltage Rating (DC)=60V, Weight=0.000282oz, Width=1.3mm
R1 R2 R3 R17 R18 R_th: library part CMP-2100-03664-2, "RES 10K OHM 1% 1/10W 0603", Case Code (Imperial)=0603, Case Code (Metric)=1608, Max Operating Temperature=155°C, Max Power Dissipation=100mW, Min Operating Temperature=-55°C, Resistance=10kR, Resistance Tolerance=1%, Resistor Type="Thick Film", Temperature Coefficient=100ppm/°C, Voltage Rating=75V, Voltage Rating (DC)=50V, Case/Package=0603, Construction=Rectangular, Depth=0.8mm, Features="Moisture Resistant", Height=0.45mm, Lead Free="Lead Free", Lead Pitch=0.3mm, Length=1.6mm, Military Standard=Not, Number of Pins=2, Number of Terminations=2, Packaging="Tape and Reel", Power Rating=100mW, RoHS Compliant=Yes, Series=RC, Size Code=0603, Termination=SMD/SMT, Tolerance=1%, Weight=7.1E-05oz, Width=0.8mm
R4 R5: library part CMP-1666-00019-3, "RES Thick Film, 4.7kΩ, 1%, 0.1W, 100ppm/°C, 0603", Case Code (Imperial)=0603, Case Code (Metric)=1608, Max Operating Temperature=155°C, Min Operating Temperature=-55°C, Package Quantity=5000, Power Rating=100mW, Resistance=4.7kR, Temperature Coefficient=100ppm/°C, Tolerance=1%, Voltage Rating=75V, Case/Package=0603, Composition="Thick Film", Contact Plating=Tin, Depth=0.85mm, Height=0.45mm, Lead Free="Lead Free", Length=1.55mm, Military Standard=Not, Mount="Surface Mount", Packaging="Tape and Reel", Termination=SMD/SMT, Voltage Rating (DC)=75V, Weight=7.1E-05oz, Width=0.85mm
R6 R7 R8 R9 R10 R11: library part CMP-2000-03824-5, "Chip Resistor, 100 Ohm, +/- 1%, 100 mW,-55 to 155 degC, 0603 (1608 Metric), RoHS, Tape and Ree", Manufacturer="Vishay Semiconductor", ComponentLink1Description="Manufacturer URL", ComponentLink1URL=http://www.vishay.com/, ComponentLink2Description=Datasheet, ComponentLink2URL=http://www.vishay.com/docs/20035/dcrcwe3.pdf, DatasheetVersion=06/2012, Mounting Technology="Surface Mount", PackageDescription="2-Pin Surface Mount Device, Body 1.575 x 0.85 mm", PackageReference=0603
R12 R20: library part CMP-2000-01856-1, Manufacturer="KOA Speer", Part Number=RK73B1JTTD111J
R13 R15: library part CMP-2000-04828-3, "RES 1kΩ 1.00% 0.1W 0603", Case Code (Imperial)=0603, Case Code (Metric)=1608, Max Operating Temperature=155°C, Max Power Dissipation=100mW, Min Operating Temperature=-55°C, Package Quantity=1, Ratings=AEC-Q200, Resistance=1kR, Resistor Type="Thick Film", Temperature Coefficient=100ppm/°C, Tolerance=1%, Voltage Rating=50V, Case/Package=0603, Construction=Rectangular, Depth=0.8mm, Features="Moisture Resistant", Height=0.022inch, Lead Free="Lead Free", Length=0.063inch, Military Standard=Not, Number of Terminations=2, Packaging="Tape and Reel", Power Rating=100mW, RoHS Compliant=Yes, Series=AC, Size Code=0603, Termination=SMD/SMT, Width=0.031inch
R16: library part CMP-2000-03059-2, "RES Thick Film, 200kΩ, 1%, 0.1W, 100ppm/°C, 0603", Case Code (Imperial)=0603, Case Code (Metric)=1608, Max Operating Temperature=155°C, Max Power Dissipation=100mW, Min Operating Temperature=-55°C, Package Quantity=10, Resistance=200kR, Temperature Coefficient=100ppm/°C, Tolerance=1%, Voltage Rating=75V, Case/Package=0603, Composition="Thick Film", Contact Plating=Tin, Depth=0.85mm, Features="Automotive AEC-Q200", Height=0.45mm, Lead Free="Lead Free", Length=1.55mm, Military Standard=Not, Mount="Surface Mount", Number of Terminations=2, Packaging="Tape and Reel", Power Rating=100mW, Radiation Hardening=No, Termination=SMD/SMT, Voltage Rating (DC)=75V, Weight=7.1E-05oz, Width=0.033inch, Working Voltage=75V
R19 R21: library part CMP-2100-03667-1, "Chip Resistor, 0 Ohm, +/- 5%, 0.1 W, -55 to 155 degC, 0603 (1608 Metric), RoHS, Tape and Reel", Case Code (Imperial)=0603, Case Code (Metric)=1608, Manufacturer=Yageo, Max Operating Temperature=155degC, Min Operating Temperature=-55degC, Package Description="2-Pin Surface Mount Device, Body 1.6 x 0.8 mm", Package Quantity=5000, Power Rating=100mW, Resistance=0mOhm, Temperature Coefficient=200ppm/degreesC, Tolerance=5%, Voltage Rating=50V, Case/Package=0603, Composition=ThickFilm, Contact Plating=Tin, Datasheet URL=http://www.yageo.com/NewPortal/yageodocoutput?fileName=/pdf/R-Chip/PYu-RC_Group_51_RoHS_L_5.pdf, Datasheet Version="Rev. 5, 10/2016", Depth=0.8mm, Height=0.45mm, Lead Free=LeadFree, Length=1.6mm, Manufacturer URL=http://www.yageo.com/, Military Standard=Not, Number of Pins=2, Package Reference=0603, Packaging=TapeandReel, Radiation Hardening=No, REACH SVHC=NoSVHC, RoHSCompliant=true, Termination=SMD/SMT, Voltage Rating (DC)=50V, Width=0.8mm
R_NTC: library part CMP-05419-000001-1, "THERMISTOR NTC 10KOHM 3380K 0603", Case Code (Imperial)=0603, Case Code (Metric)=1608, Max Operating Temperature=125°C, Max Power Dissipation=100mW, Min Operating Temperature=-40°C, Package Quantity=4000, Resistance=10kR, Resistance Tolerance=1%, Accuracy=1%, Case/Package=0603, Depth=0.8mm, Height=0.8mm, Lead Free="Lead Free", Length=1.6mm, Mount="Surface Mount", Number of Pins=2, Packaging="Tape and Reel", Power Rating=100mW, Radiation Hardening=No, REACH SVHC="No SVHC", RoHS Compliant=Yes, Series=ERT-J, Termination=SMD/SMT, Tolerance=1%, Width=800um
R_sense: library part CMP-2001-03155-1, Manufacturer=Susumu, Part Number=RL1220S-R15-F
U1: "No Description Available", Mfr_Name="Texas Instruments", Supplier Part Number 1=296-TMCS1108A4BQDRCT-ND, RefDes=RefDes, Supplier 1=Digikey, Type=TYPE
U2: "No Description Available", Mfr_Name=onsemi, RefDes=RefDes, Type=Type
U3: library part CMP-0304-00067-2, "ARM Cortex-M0 32-bit MCU, 32 KB Flash, 4 KB Internal RAM, 26 I/Os, 32-Pin LQFP, -40 to 85 degC, Tape and Reel", I/Os (High Current)=26, Manufacturer=STMicroelectronics, Operating Frequency(F) (Processor speed) (MHz)=48, Package Description="32-Pin Low Profile Quad Flat Package, 7 x 7 mm Body, 0.8 mm Pitch", Package Reference=LQFP32, Supply Voltage(Vcc) min (V)=2.4, ComponentLink1Description="Manufacturer URL", ComponentLink1URL=http://www.st.com/, ComponentLink2Description=Datasheet, ComponentLink2URL=http://www.st.com/st-web-ui/static/active/en/resource/technical/document/datasheet/DM00088500.pdf, Core="ARM Cortex-M0", DatasheetVersion="Rev. 2", FLASH Size (Prog) (kB)=32, Internal RAM Size (kB)=4, Mounting Technology="Surface Mount", Packing="Tape and Reel", PartNumber=STM32F030K6T6TR
U4: library part CMP-0321-00736-2, "Analog Front End for 3 to 6 Series Lithium-Ion Cells, -25 to 85 degC, 20-pin TSSOP (PW), Green (RoHS & no Sb/Br)", Manufacturer="Texas Instruments", Over Voltage Protection=N, Code_JEDEC=MO-153, ComponentLink1Description=Datasheet, ComponentLink1URL=http://www.ti.com/general/docs/lit/getliterature.tsp?genericPartNumber=BQ76925&fileType=pdf, DatasheetVersion=SLUSAM9B, Eco-Plan="Green (RoHS & no Sb/Br)", Lead Acid=N, Li-Ion=Y, Li-Polymer=Y, Mounting Technology="Surface Mount", NiCd=N, NiMH=N, PackageDescription="20-Pin Plastic Thin Small Outline Package 6.5 x 4.4 mm Body ,0.65 mm Pitch", PackageReference=PW0020A, PackageVersion="revG, Feb-2011", PartNumber=BQ76925PWR, SubFamily="Lithium Ion Protection"
U5: library part CMP-0244-00410-1, "Positive Voltage Regulator, 3.3V, 4-Pin SOT-89, Tape and Reel", ComponentLink1Description="Manufacturer URL", ComponentLink1URL=http://www.st.com, ComponentLink2Description=Datasheet, ComponentLink2URL=http://www.st.com/internet/com/TECHNICAL_RESOURCES/TECHNICAL_LITERATURE/DATASHEET/CD00000446.pdf, DatasheetVersion=1/02/2011, PackageDescription="3-Pin SOT-89 Package 1.5 mm Pitch, 4.1 mm Lead Span", PackageReference=SOT-89, PackageVersion=2011

## Via types
v1: diameter 27.56, hole 15.75, Top Layer to Bottom Layer, 51 vias
v2: diameter 50/50/50/50 (per signal layer), hole 28, Top Layer to Bottom Layer, 1 vias

## Nets (pads, with @x,y where several pads share a name; then routed paths per layer and width w, separated by ;. In a path a pad name is that pad's centre, name@x,y a point inside that pad or via, vN(x,y) a via of type N, cw(c..) or ccw(c..) an arc to the next point about the centre after c; other vN are vias at no path point)
+3V3: C1.2 C2.2 C3.2 C4.2 C5.2 C19.2 C21.2 D1.2 J22.1 Q1.3 R2.1 R4.2 R5.2 U1.8 U3.1 U3.5 U3.17 U4.20 U5.1 | length 1196.5
  Top Layer w20: U5.1@479.06,924.97 U5.1 479.06,957.05 504.26,982.25 504.26,1004.26 v1(510,1010) ; C4.2 1332.5,1087.5 1332.5,1002.5 C5.2 1335,845.57 1336.67,843.9 U3.17 ; U3.1 1686.57,583.43 1725.22,544.78 1785,544.78 1871.16,544.78 1880,535.94 1880.94,535 D1.2 1978.5,533.5 C3.2@1978.5,470 ; U3.5@1720.31,750 1742.14,750 1746.5,754.36 v1(1795.92,754.36) ; v1(1895,470) 1895.68,469.32 1974.32,469.32 C3.2@1976.04,467.6 ; R2.1 2043.02,720 2081.57,681.45 2098.55,681.45 v1(2100,680)
  Top Layer w30: U1.8@1113.63,1445 v2(1215,1445)
  Bottom Layer w20: C21.2@468.21,1071.79 504.26,1035.74 504.26,1015.74 v1(510,1010)
  other v1: 1210,955
ADC_REF: U3.9 U4.17 | length 1111.6
  Top Layer w10: U4.17 1018.39,673.39 v1(1040,695) ; U3.9 1690,900 v1(1725,935)
  GND w10: v1(1040,695) 1215,695 1265,745 1330,745 1500,915 1500,995 1530,1025 1635,1025 v1(1725,935)
BAT_VOLTAGE: C17.1 C20.1 Q1.2 R12.2 R16.1 U4.2 U5.3 | length 1736.9
  Top Layer w10: U4.2 727.73,724.63 696.23,724.63 665.86,755 665.86,809.14 596.78,878.22 596.78,930.72 641.06,975 R12.2 648.94,975 688.94,1015 v1(780,1015) ; Q1.2 916.43,940 Q1.2@923.24,933.19
  Top Layer w20: v1(330,1015) 360.94,984.06 360.94,969.8 ; U4.2 804.57,724.57 880.77,800.77 895.77,800.77 923.24,828.24 Q1.2@923.24,933.19
  GND w10: v1(330,1015) v1@336.57,1015
  GND w20: v1@336.57,1015 361.57,1040 435,1040 467.5,1007.5 467.5,962.5 515,915 725,915 780,970 v1(780,1015)
  Bottom Layer w10: v1@777.57,1017.43 v1(780,1015)
  Bottom Layer w20: C20.1 657.83,1042.83 670,1055 765,1055 777.57,1042.43 v1@777.57,1017.43
Cell_1: C11.1 R6.2 U4.8 | length 776.8
  Top Layer w10: U4.8 773.98,571.02 820,525 v1(820,470)
  Top Layer w20: R6.2 484.84,617.72 484.84,631.16 483.62,632.39 483.62,692.95 519.22,728.55 538.55,728.55 v1(540,730)
  GND w10: v1(540,730) 570,700 590,700 635,655 635,545 710,470 v1(820,470)
Cell_2: C12.1 R7.2 U4.7 | length 281.7
  Top Layer w10: C12.1@619.72,529.53 619.72,554.72 661.61,596.61 U4.7
  Top Layer w20: R7.2 610,520 C12.1 614.95,524.76 C12.1@619.72,529.53
Cell_3: C13.1 R8.2 U4.6 | length 744.9
  Top Layer w10: v1(590,605) 594.75,605 610.85,621.1 726.69,621.1 U4.6
  Top Layer w20: R8.2 492.56,427.05 500.28,419.33 503.23,419.33 547.56,375 C13.1 736.38,382.03 735.69,382.72 735.69,444.31 v1(735,445)
  GND w10: v1(590,605) 590,520 665,445 v1(735,445)
Cell_4: C14.1 R9.2 U4.5 | length 1098
  Top Layer w10: v1(575,665) 592.2,647.8 U4.5
  Top Layer w20: R9.2 492.56,332.05 500.28,324.33 503.23,324.33 532.56,295 694.33,295 741.38,247.95 C14.1 741.38,216.38 710,185 v1(680,185)
  GND w10: v1(575,665) 572.77,665 550,642.23 550,500 680,370 v1(680,185)
Cell_5: C15.1 R10.2 U4.4 | length 1638.7
  Top Layer w10: v1(590,740) 656.61,673.39 U4.4
  Top Layer w20: R10.2 492.56,242.05 500.28,234.33 503.23,234.33 607.56,130 865,130 950,215 C15.1 950,290 910,330 v1(880,330)
  GND w10: v1(590,740) 660,810 830,810 855,785 855,505 880,480 v1(880,330)
Cell_6: C16.1 R11.2 U4.3 | length 1913.1
  Top Layer w10: v1(605,810) 645.86,769.14 645.86,744.14 691.02,698.98 U4.3
  Top Layer w20: R11.2 492.56,112.44 540,65 975,65 1055,145 1055,320.67 998.62,377.05 C16.1 999.31,380.69 999.31,449.31 v1(1000,450)
  GND w10: v1(605,810) 640,845 850,845 890,805 890,515 930,475 975,475 v1(1000,450)
Cell_Voltage_ADC: C9.1 U3.14 U4.15 | length 980.2
  Top Layer w10: U4.15 1027.2,622.2 1035,630 v1(1130,630) ; U3.14 1472.99,926.57 1520.16,973.74 1520.16,989.09 C9.1 ; C9.1@1523.95,989.98 v1(1580,990)
  GND w10: v1(1130,630) 1280,630 1580,930 v1(1580,990)
Current_ADC_MCU: U1.7 U3.6 | length 1382.9
  Top Layer w10: U1.7@1040,1395 U1.7 1082.52,1397.5 1632.5,1397.5 v1(1635,1400) ; U3.6@1687.48,780.91 1742.8,780.91 1766.22,804.33 1799.33,804.33 v1(1800,805)
  Bottom Layer w10: v1(1635,1400) 1705,1330 1705,1010 1800,915 v1(1800,805)
Current_Voltage_ADC: C10.1 U3.15 U4.14 | length 1111.6
  Top Layer w10: U4.14 v1(1073.77,596.61) ; v1(1375,1145) 1400,1120 1400,1047.31 1440,1007.31 U3.15@1440,900.67
  Bottom Layer w10: v1(1073.77,596.61) 1151.61,596.61 1311.49,756.49 1311.49,1081.49 v1(1375,1145)
Fault_Alert: R21.1 U3.21 | length 251.7
  Top Layer w10: R21.1 1250,675 1292.98,717.98 1353.83,717.98 U3.21
GND: C1.1 C2.1 C3.1 C4.1 C5.1 C6.1 C9.2 C10.2 C11.2 C12.2 C13.2 C14.2 C15.2 C16.2 C17.2 C19.1 C20.2 C21.1 C_th.1 J1.7 J20.N J22.5 R1.1 R3.1 R15.1 R17.1 R18.1 R19.1 R_NTC.1 R_sense.1 U1.5 U1.6 U3.16 U3.32 U4.9 U4.10 U5.2 | length 360.2
  Top Layer w10: v1(685,1110) R17.1 ; C19.1@1135,955 v1(1135,1020) ; v1@1225.25,1140 C4.1@1275.25,1090 ; v1(1385,955) 1385,953.29 1410,928.29 U3.16
  Top Layer w20: C4.1@1275.25,1090 C4.1 1277.75,1088.19 1277.75,1001.81 C5.1
  other v1: 715,970 1580,1055 1225,1140 1290,1330
"High_Side Switching": R20.1 U3.10 | length 178.3
  Top Layer w10: U3.10 1598.98,953.98 1655,1010 1699.88,1010 R20.1
I2C1_SCL: R5.1 U3.19 U4.19 | length 624.2
  Top Layer w10: U4.19 955.08,727.44 977.44,727.44 995,745 995,830 1006.11,841.11 1006.36,841.11 1030,864.75 v1(1030,865) R5.1 ; v1(1265,825) 1303.81,786.19 1318.35,786.19 1321.03,783.51 1351.13,783.51 U3.19@1353.81,786.19
  GND w10: v1@1025,860 1040,845 1255,845 1263.52,836.48 1263.52,826.48 v1(1265,825)
I2C1_SDA: R4.1 U3.20 U4.18 | length 549.6
  Top Layer w10: U4.18 955.08,701.85 982.83,701.85 1035,754.02 v1(1035,770) ; v1@1032.64,767.64 v1(1035,770) ; R4.1 v1(1035,770) ; v1(1260,775) 1260.22,775 1285.52,749.7 U3.20@1356.52,749.7
  GND w10: v1(1035,770) 1065,740 1225,740 v1(1260,775)
MCU_Bootloader: R1.2 U3.31 | length 97
  Top Layer w10: R1.2@1596.02,485.63 1603.98,477.66 R1.2@1607,477.66 ; R1.2@1599.01,484.61 R1.2@1599.01,490.43 ; U3.31 R1.2@1598.98,490.47 ; R1.2@1598.98,490.47 R1.2@1599.01,490.43
MCU_NRST: C6.2 J22.4 R2.2 U3.4 | length 1295.6
  Top Layer w10: v1(1495,740) 1590,740 1612.09,717.91 U3.4 1688.03,716.46 1778.54,716.46 v1(1780,715) ; v1(2040,830) 2040,775.75 R2.2@2041.23,774.52 ; R2.2@2042.46,775.75 R2.2@2041.23,774.52 ; C6.2 2118.03,780.75 2110.57,773.28 R2.2 R2.2@2041.23,774.52
  GND w10: v1(1780,715) 1810,715 1925,830 v1(2040,830)
  Bottom Layer w10: v1(1495,740) 1440,685 1440,390 1530,300 J22.4@1530,250
MCU_SWCLK: J22.2 U3.24 | length 685.8
  Top Layer w10: U3.24 1428.43,623.43 1455,650 v1(1540,650)
  Bottom Layer w10: v1(1540,650) 1569.79,620.21 1580,610 1580,490 1730,340 J22.2
MCU_SWDIO: J22.3 U3.23 | length 655.7
  Top Layer w10: U3.23 1424.92,654.92 1460,690 v1(1485,690)
  Bottom Layer w10: v1(1485,690) 1485,500 1630,355 J22.3
NetC18_1: C18.1 R15.2 U4.11 | length 1087.4
  Top Layer w10: U4.11 990.16,519.84 1050.75,459.25 C18.1 v1(1085,410)
  Bottom Layer w10: R15.2@785,1165 786.63,1165 797.96,1153.68 797.96,1152.04 925,1025 925,600 1085,440 v1(1085,410)
NetC18_2: C18.2 R13.2 U4.12 | length 989.9
  Top Layer w10: U4.12 1009.57,545.43 1064.25,490.75 C18.2 1085.37,490.37 1139.63,490.37 v1(1140,490)
  Power w10: v1(1065,1060) 985,980 985,605 1100,490 v1(1140,490)
  Bottom Layer w10: v1(1065,1060) 1068.36,1063.36 1092.89,1063.36 1133.95,1104.42 R13.2
NetD1_1: D1.1 R3.2 | length 74.1
  Top Layer w10: D1.1 2040,560 2050,570 R3.2
NetD2_1: D2.1 R18.2 | length 82.1
  Top Layer w10: D2.1 1875.15,718.36 R18.2
NetJ1_1: J1.1 R11.1 | length 230.5
  Top Layer w20: J1.1 275,155 R11.1@448.89,155
NetJ1_2: J1.2 R10.1 | length 230.4
  Top Layer w20: J1.2 285,245 R10.1@444.74,245
NetJ1_3: J1.3 R9.1 | length 227.3
  Top Layer w20: J1.3 297.44,395 357.44,335 R9.1
NetJ1_4: J1.4 R8.1 | length 229.4
  Top Layer w20: J1.4 289.88,495 354.88,430 R8.1
NetJ1_5: J1.5 R7.1 | length 244.3
  Top Layer w20: J1.5 270,560 397.44,560 426.77,530.67 429.72,530.67 443.86,516.53 R7.1@443.86,513.58
NetJ1_6: J1.6 R6.1 | length 232.5
  Top Layer w20: J1.6@243.72,703.72 327.44,620 379.87,620 389.87,610 R6.1
NetQ2_1: Q2.1 R20.2 | length 130.9
  Top Layer w10: Q2.1 1655,1110 1685.31,1079.69 1685.31,1075.75 1696.06,1065 R20.2
NetQ2_2: Q2.2 R17.2 U2.1 | length 1342.8
  Top Layer w10: U2.1 555,1275 603.36,1226.64 R17.2 818,1226.64 868.9,1175.75 v1@869.25,1175.75 ; v1(1440,1330) 1572.83,1330 1653.03,1249.8 Q2.2
  Bottom Layer w10: v1(865,1175) 1005,1175 1065,1235 1345,1235 v1(1440,1330)
NetR21_2: R21.2 U4.13 | length 249.5
  Top Layer w10: U4.13 1028.98,571.02 1055,545 R21.2
NetR_th_2: R_th.2 U4.16 | length 1368.2
  Top Layer w10: U4.16 1022.8,647.8 1035,660 1087.33,660 1097.33,670 v1(1100,670) ; R_th.2 1895.82,899.18 1964.18,899.18 v1(1965,900)
  Power w10: v1(1100,670) 1205,775 1205,845 1270,910 1640,910 1745,1015 1925,1015 1965,975 v1(1965,900)
Pack+: J20.P R12.1 U1.1 U1.2 | length 663.3
  Top Layer w20: v1(565,1170) 565,1106.18 R12.1@641.18,1030
  GND w20: J20.P 563.46,1225 563.46,1171.54 v1(565,1170) ; J20.P@290,1514.8 J20.P@290,1521.73
"Pack+ Out": J21.P U2.4 | length 1086.3
  Top Layer w75: U2.4 705.46,1710 1706.2,1710
"Pack+ Sensor Out": Q2.3 U1.3 U1.4 U2.3 | length 721.3
  Top Layer w20: U1.4@890.53,1294.45 U1.4 965,1295 1047.6,1212.4 Q2.3
Pack-: J21.N R13.1 R19.2 R_sense.2
Status_LED_Control: D2.2 U3.7 | length 233.7
  Top Layer w10: U3.7 1738.5,812.4 1766.1,840 1845,840 1870,815 D2.2
Temp_ADC_MCU: C_th.2 R_NTC.2 R_th.1 U3.8 | length 945.6
  Top Layer w10: v1(1595,825) 1597.91,825 1616.8,843.9 U3.8 1717.68,875 1790,875 1810,895 C_th.2 1810,926.97 1812.87,929.84 1814.84,929.84 1836.64,951.64 R_th.1
  GND w10: v1(1330,490) 1416.22,576.22 1416.22,729.85 1511.37,825 v1(1595,825)
  Bottom Layer w10: R_NTC.2 1250.75,489.25 1329.25,489.25 v1(1330,490)
Transistor_CTL: Q1.1 R16.2 U4.1 | length 426.1
  Top Layer w10: U4.1 790.16,750.16 869.45,829.45 869.45,850.4 878.58,859.54 874.51,859.54 867.07,866.97 867.07,871.04 850,888.12 850,994.76 870.04,1014.8 Q1.1
pads on no net: J1.8 U3.2 U3.3 U3.11 U3.12 U3.13 U3.18 U3.22 U3.25 U3.26 U3.27 U3.28 U3.29 U3.30

## Polygon pours and split planes (outlines as drawn)
GND on Top Layer "GND_Top" (solid, remove dead copper, pour order 34): 112.8,1115 675,1115 775,1015 775,515 1395,515 1395,1125 2165,1125 2165,425 1765,25 117.28,25
+3V3 on Top Layer "+3V3-Top" (solid, remove dead copper, pour order 16): 805.77,1125 1070,1125 1105,1160 1335,1160 1335,565 813.41,565
"Pack+ Sensor Out" on Top Layer "GND" (solid, remove dead copper, pour order 11): 535,1355 725,1355 930,1355 930,1270 870,1210 535,1210
"Pack+ Out" on Top Layer "Pack+ Out" (solid, remove dead copper, pour order 28): 1500,1810 2135,1810 2135,1305 1835,1305 1500,1640
Pack+ on Top Layer "Pack+" (solid, remove dead copper, pour order 23): 100,1380 100,1815 845,1815 845,1545 945,1445 945,1380
GND on Top Layer "GND_Top_Hall_Sensor" (solid, remove dead copper, pour order 20): 1020,1370 1560,1370 1560,1280 1020,1275.71
Pack- on Bottom Layer "Pack-" (solid, remove dead copper, pour order 29): 110,1732.85 110,1150 2160,1150 2160,1685 2107.55,1737.45
GND on Bottom Layer "GND_Bottom" (solid, remove dead copper, pour order 27): 120,1127.5 2165,1127.5 2165,430 1760,25 120,25
+3V3 on Power "+3V3" (solid, remove dead copper, pour order 33): 2145,1644.38 2145,405 1800,60 115,60 115,1780 2008.08,1780
GND on GND "GND" (solid, remove dead copper, pour order 35): 120.04,1785 2060,1785 2155,1690 2155,440 1775,60 110.04,60

## Silkscreen, mask and mechanical layers (free items; w line width, h text height)
Top Overlay:
  drawing of 17 lines, arcs and shapes, not listed
  text "Out +" at 2095,1510.39 h35
  text "In+" at 40,1500 h35
  text "Battery Management Board Prototype Rev.2" at 1247.5,1425 h65
  text "Out -" at 2095,1230.39 h35
  text "In -" at 40,1210 h35
  text "NC" at 90,885.39 h35
  text "GND" at 75,785.39 h35
  text "Cell_1" at 75,686.22 h35
  text "Cell_2" at 75,586.22 h35
  text "Cell_3" at 75,486.22 h35
  text "Cell_4" at 75,386.22 h35
  text "Cell_5" at 75,281.22 h35
  text "Cell_6" at 75,181.22 h35
  text "GND" at 1405,150.39 h35
  text "RESET" at 1490,150.33 h30
  text "SWDIO" at 1590,150.33 h30
  text "SWCLK" at 1700,150.33 h30
  text "+3v3" at 1815,150.33 h30
Mechanical 1:
  lines w10: 0,-5 1810,-5 2185,370 2185,1885 0,1885 0,-5

## Text inside footprints (layer, text, board x,y; h text height)
U2: Top 3D Body "*" at 542.5,1435 h50; Top Overlay "*" at 459.92,1350 h50